# Altium PCB SMA-TH_HL-SMA-KHD4.pcbdoc
Units mil, origin at the board's own origin, x right, y up, seen from the top; angles counter-clockwise.
Board outline 810 x 800 mil, 2 copper layers (Top Layer, Bottom Layer), stack 0 mil thick; 1 components, 0 nets, 5 pads, 0 vias.
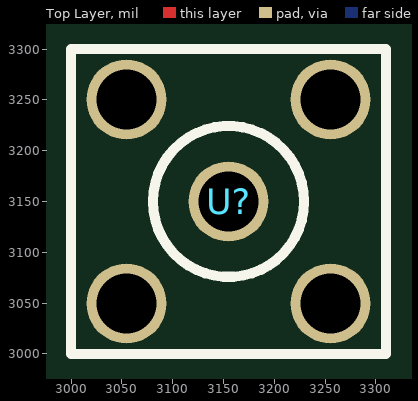
[diagram p0: Top Layer view]
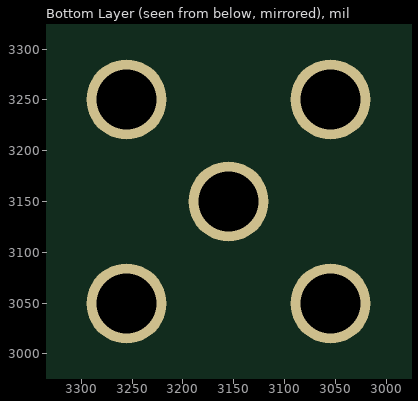
[diagram p1: Bottom Layer view, seen from below]

## Layer stack, top to bottom
Top Layer: signal copper (thickness not stored)
Bottom Layer: signal copper (thickness not stored)

## Board outline
3560,2750 2750,2750 2750,3550 3560,3550

## Components (designator, comment, footprint, x,y, rotation, side; value= is the part's Value field where it differs from the comment)
U? "" SMA-TH_HL-SMA-KHD4 3155,3150 r0 top

## Footprints (in the part's own frame and the unit in brackets; to place one, negate y for a bottom-side part, rotate by r counter-clockwise, add the part's x,y. Pads: shape width x height; smd on the part's side, far side on the other; paste and mask are expansions set on the pad)
SMA-TH_HL-SMA-KHD4 [mm]
  round 2 hole 1.5: 1(-2.55,2.55) 2(2.55,2.55) 3(2.55,-2.55) 4(-2.55,-2.55) 5(0,0)
  silkscreen extent -3.94,-3.81 3.94,3.81

## Nets (pads, with @x,y where several pads share a name; then routed paths per layer and width w, separated by ;. In a path a pad name is that pad's centre, name@x,y a point inside that pad or via, vN(x,y) a via of type N, cw(c..) or ccw(c..) an arc to the next point about the centre after c; other vN are vias at no path point)
pads on no net: U?.1 U?.2 U?.3 U?.4 U?.5